# Altium PCB IndAlarmSe1.PcbDoc
Units mil, origin at the board's own origin, x right, y up, seen from the top; angles counter-clockwise.
Board outline 6000 x 4000 mil, 2 copper layers (Top Layer, Bottom Layer); 19 components, 26 nets, 82 pads, 6 vias.
Unrouted connection lines stored in the file: 61.
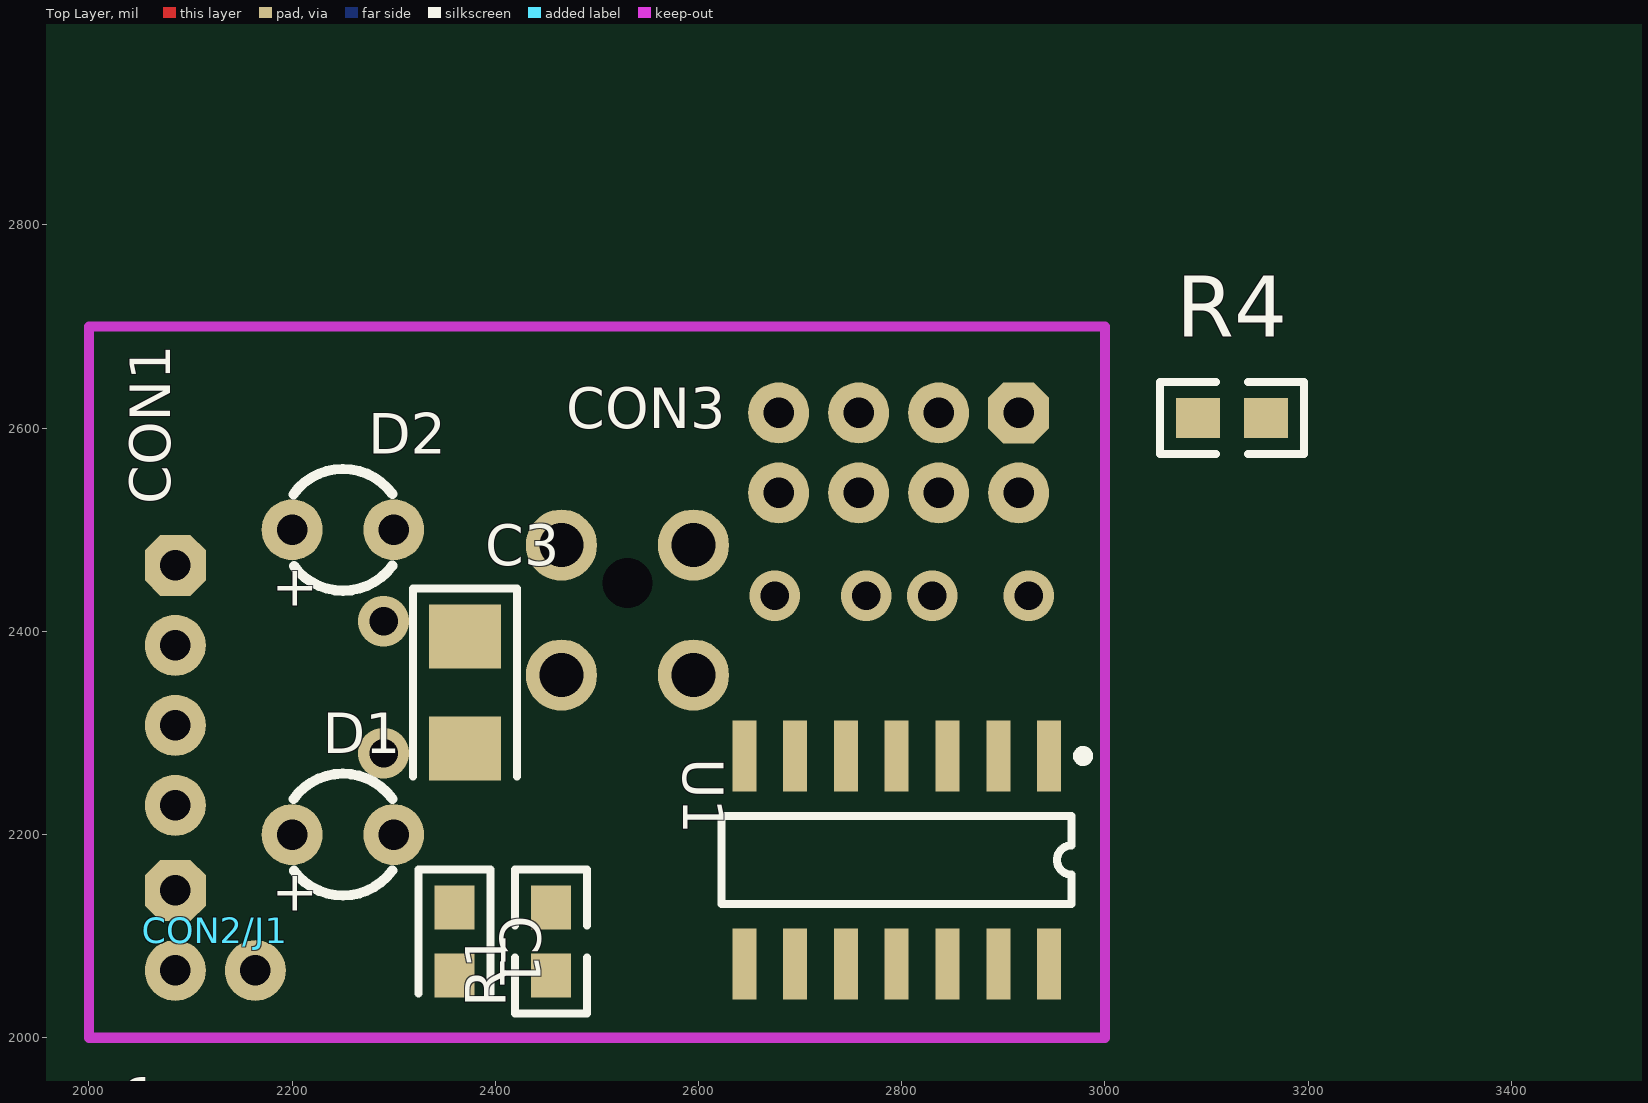
[diagram p0: Top Layer view]
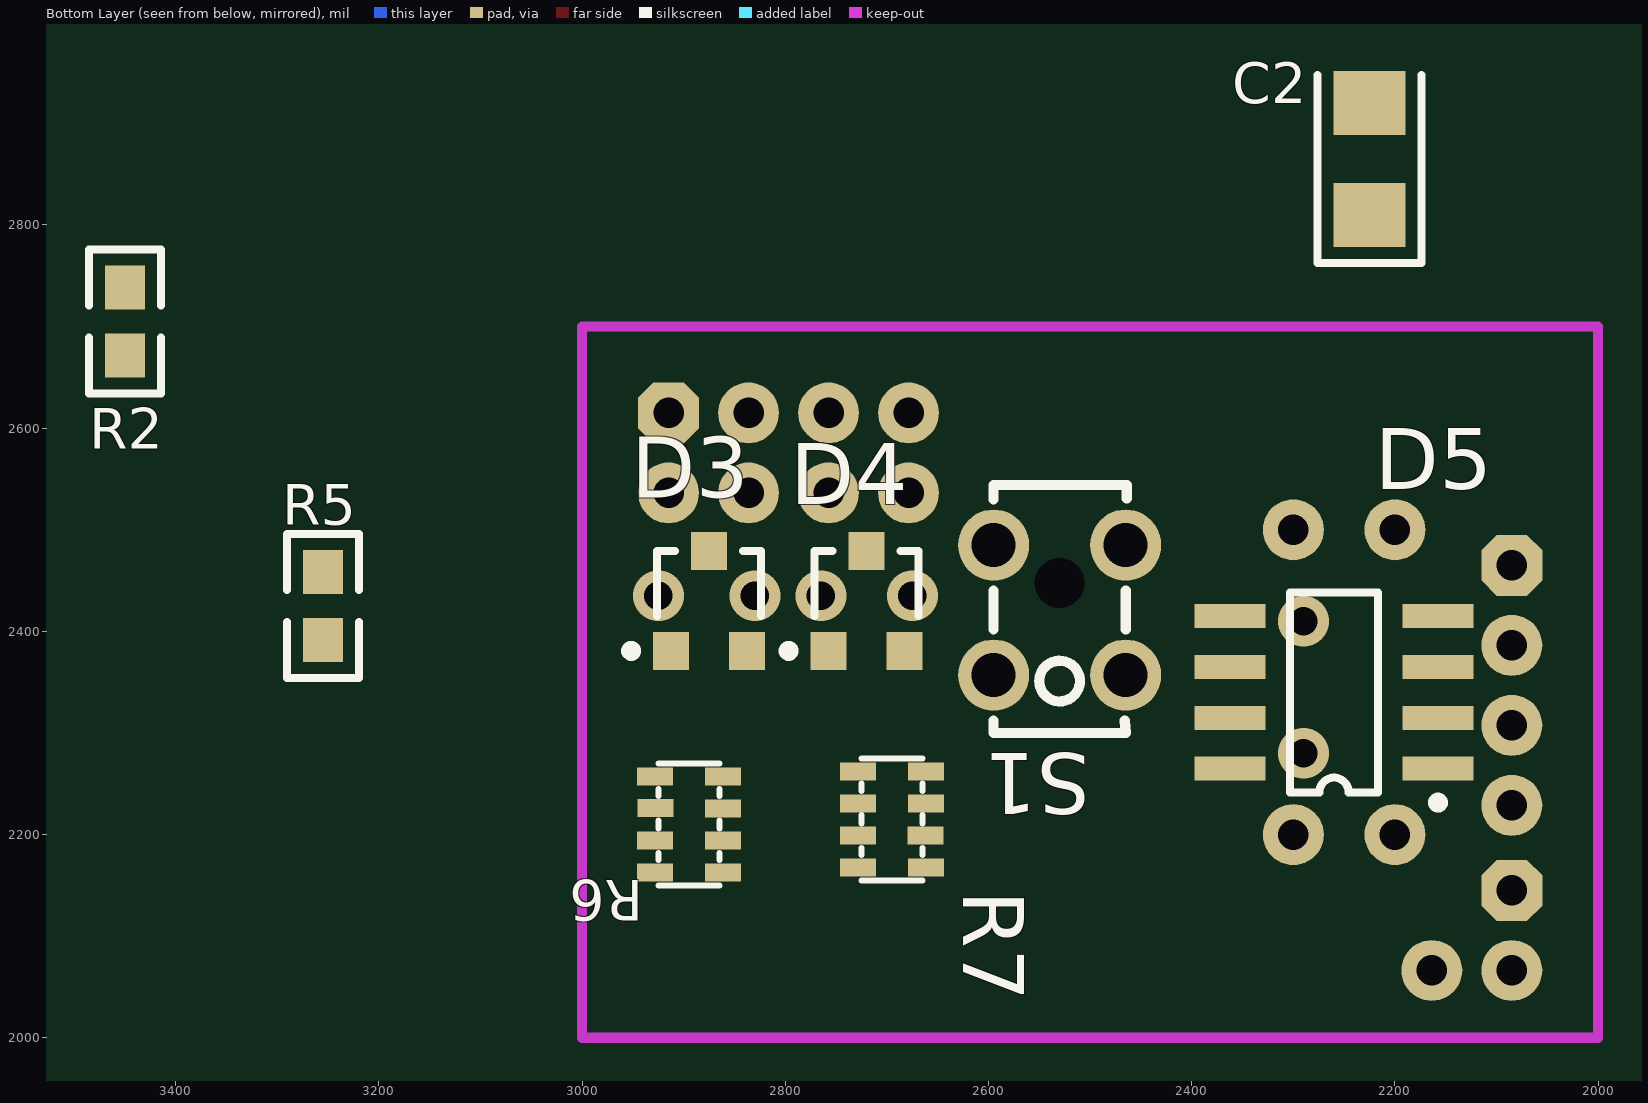
[diagram p1: Bottom Layer view, seen from below]

## Layer stack, top to bottom
Top Layer: signal copper 1.4
Dielectric: dielectric 12.6, FR-4, Dk 4.8
Bottom Layer: signal copper 1.4

## Board outline
1000,1000 7000,1000 7000,5000 1000,5000

## Design rules (kind name [scope] priority, off if disabled: settings)
Clearance [All] p1: gap=10
ComponentClearance [All] p1: gap=0 collisioncheckmode=1
PolygonConnect [All] p1: connectstyle=Relief reliefconductorwidth=10 reliefentries=4 polygonreliefangle="90 Angle"
RoutingLayers [All] p1: top layer=Horizontal bottom layer=Vertical
RoutingVias [All] p1: holewidth=28 width=50 viastyle="Through Hole" minholewidth=28 minwidth=50 maxholewidth=28 maxwidth=50
SolderMaskExpansion [All] p1: expansion=4
TestPointUsage [All] p1: valid=0 allowmultiple=FALSE
Testpoint [All] p1: side=15 testpointundercomponent=TRUE minsize=40 maxsize=100 preferedsize=60 minholesize=0 maxholesize=40 preferedholesize=32 testpointgrid=1 style=1023 order=-539222988
Width [All] p1: maxlimit=10 minlimit=10 preferedwidth=10
16 further rules are at their usual default settings.

## Components (designator, comment, footprint, x,y, rotation, side; value= is the part's Value field where it differs from the comment)
C1 "Cap Semi" CC1608-0603 2360,2095 r270 top
C2 "Cap Semi" CC3216-1206 2225,2865 r90 bottom
C3 "Cap Semi" CC3216-1206 2370,2340 r270 top
CON1 "Header 4" 4MM2 2085,2465 r270 top
CON2/J1 "Header 3" 3MM2L 2085,2145 r270 top
CON3 "Header 4X2" 4X2MM2 2915,2615 r180 top
D1 "LED Red" LED3MM 2200,2200 r0 top
D2 "LED Green" LED3MM 2200,2500 r0 top
D3 "ESDA6V1L" SO-G3/C2.5 2875,2430 r180 bottom
D4 "ESDA6V1L" SO-G3/C2.5 2720,2430 r180 bottom
D5 "USB6B1" NSO8 2260,2340 r90 bottom
R1 "Res Semi" CR1608-0603 2455,2095 r270 top
R2 "Res Semi" CR1608-0603 3450,2705 r270 bottom
R4 "Res Semi" CR1608-0603 3125,2610 r0 top
R5 "Res Semi" CR1608-0603 3255,2425 r270 bottom
R6 "RES4" YC164 2895,2210 r90 bottom
R7 "RES4" YC164 2695,2215 r270 bottom
S1 "SW-PB" SPPB512300 2595,2485 r270 bottom
U1 "ATTINY44" SO-G14 2795,2175 r180 top

## Footprints (in the part's own frame and the unit in brackets; to place one, negate y for a bottom-side part, rotate by r counter-clockwise, add the part's x,y. Pads: shape width x height; smd on the part's side, far side on the other; paste and mask are expansions set on the pad)
3MM2L [mil]
  oct 60x60 hole 30: 1(0,0)
  round 60 hole 30: 2(78.74,0) 3(78.74,78.74)
4MM2 [mil]
  oct 60x60 hole 30: 1(0,0)
  round 60 hole 30: 2(78.74,0) 3(157.48,0) 4(236.22,0)
4X2MM2 [mil]
  oct 60x60 hole 30: 1(0,0)
  round 60 hole 30: 2(0,78.74) 3(78.74,0) 4(78.74,78.74) 5(157.48,0) 6(157.48,78.74) 7(236.22,0) 8(236.22,78.74)
CC1608-0603 [mm]
  rect 1.1x1 smd: 1(-0.85,0) 2(0.85,0)
  silkscreen extent -1.8,-0.9 1.3,0.9
CC3216-1206 [mm]
  rect 1.6x1.8 smd: 1(-1.4,0) 2(1.4,0)
  silkscreen extent -2.6,-1.3 2.1,1.3
CR1608-0603 [mm]
  rect 1.1x1 smd: 1(-0.85,0) 2(0.85,0)
  silkscreen extent -1.8,-0.9 1.8,0.9
LED3MM [mil]
  round 60 hole 30: 1(0,0) 2(100,0)
  silkscreen extent 1,-60 99,60
NSO8 [mm] "Small Outline; 8 Leads; Body Width 3.9 mm; Pitch 1.27 mm"
  rect 0.6x1.778 smd: 1(-1.905,-2.6) 2(-0.635,-2.6) 3(0.635,-2.6) 4(1.905,-2.6) 5(1.905,2.6) 6(0.635,2.6) 7(-0.635,2.6) 8(-1.905,2.6)
  silkscreen extent -2.88,-2.72 2.5,1.1
SO-G3/C2.5 [mm]
  rect 0.9x0.95 smd: 1(-0.95,-1.25) 2(0.95,-1.25) 3(0,1.25)
  silkscreen extent -2.08,-1.37 1.3,1.25
SO-G14 [mm]
  rect 0.6x1.778 smd: 1(-3.81,-2.6) 2(-2.54,-2.6) 3(-1.27,-2.6) 4(0,-2.6) 5(1.27,-2.6) 6(2.54,-2.6) 7(3.81,-2.6) 8(3.81,2.6) 9(2.54,2.6) 10(1.27,2.6) 11(0,2.6) 12(-1.27,2.6) 13(-2.54,2.6) 14(-3.81,2.6)
  silkscreen extent -4.78,-2.72 4.38,1.1
SPPB512300 [mm] "SPPB series switch"
  round 0 hole 1.25: 0(0.95,1.65)
  round 1.778 hole 1.1: 1(0,0) 1(0,3.3) 2(3.25,0) 2(3.25,3.3)
  silkscreen extent -1.5,0 4.7,3.33
YC164 [mm] "YC164 Chip Resistor array"
  rect 0.45x0.9 smd: 1(-1.2,-0.85) 2(-0.4,-0.85) 3(0.4,-0.85) 4(1.2,-0.85) 5(1.2,0.85) 6(0.406,0.838) 7(-0.4,0.85) 8(-1.2,0.85)
  silkscreen extent -1.52,-0.76 1.52,0.76

## Part data
C1 C2 C3: "Capacitor (Semiconductor SIM Model)"
CON1: "Header, 4-Pin"
CON2/J1: "Header, 3-Pin"
CON3: library part "Header 3X2", "Header, 3-Pin, Dual row"
D1 D2: library part LED3, "Typical BLUE SiC LED"
D3 D4: "DUAL TRANSIL ARRAY / FOR ESD PROTECTION"
R1 R2 R4 R5: "Semiconductor Resistor"
R6: library part "Res Semi", "Semiconductor Resistor"
S1: "Switch"

## Via types
v1: diameter 50, hole 28, Top Layer to Bottom Layer, 6 vias

## Nets (pads, with @x,y where several pads share a name; then routed paths per layer and width w, separated by ;. In a path a pad name is that pad's centre, name@x,y a point inside that pad or via, vN(x,y) a via of type N, cw(c..) or ccw(c..) an arc to the next point about the centre after c; other vN are vias at no path point)
AN0: R6.8 U1.13
AN1: R6.7 U1.12
AN2: R6.6 U1.11
AN3: R6.5 U1.10
AN4: CON2/J1.3 D1.2 R2.2 S1.1
GND: C1.1 C2.1 C3.1 D3.3 D4.3 D5.5 U1.14
  other v1: 2290,2410
MISO: CON2/J1.2 U1.8
MOSI: D5.6 U1.7
NetCON1_1: CON1.1 D5.4
NetCON1_2: CON1.2 D5.3
NetCON1_3: CON1.3 D5.2
NetCON1_4: CON1.4 D5.1
NetCON3_1: CON3.1 CON3.3 CON3.5 R5.2
NetCON3_2: CON3.2 D3.1 R6.1 R7.1
  other v1: 2925,2435
NetCON3_4: CON3.4 D3.2 R6.2 R7.2
  other v1: 2830,2435
NetCON3_6: CON3.6 D4.1 R6.3 R7.3
  other v1: 2765,2435
NetCON3_7: CON3.7 D1.1 D2.2 R4.2
NetCON3_8: CON3.8 D4.2 R6.4 R7.4
  other v1: 2675,2435
NetD2_1: D2.1 S1.2
OA1: R5.1 U1.2
OA2: R4.1 U1.5
OB1: R7.6 R7.7 R7.8 U1.3
OB2: R2.1 R7.5 U1.6
R\E\S\E\T\: C1.2 CON2/J1.1 R1.2 U1.4
SCK: D5.7 U1.9
VCC: C2.2 C3.2 D5.8 R1.1 U1.1
  other v1: 2290,2280
pads on no net: S1.0

## Keep-outs
Keep-Out Layer:
  lines w10: 2000,2000 3000,2000 3000,2700 2000,2700 2000,2000

## Text inside footprints (layer, text, board x,y; h text height)
D1: Top Overlay "+" at 2180,2125 h40
D2: Top Overlay "+" at 2180,2425 h40